# Altium PCB PCB.PcbDoc
Units mm, origin at the board's own origin, x right, y up, seen from the top; angles counter-clockwise.
Board outline 100 x 100 mm, 2 copper layers (Top Layer, Bottom Layer); 55 components, 45 nets, 174 pads, 27 vias.
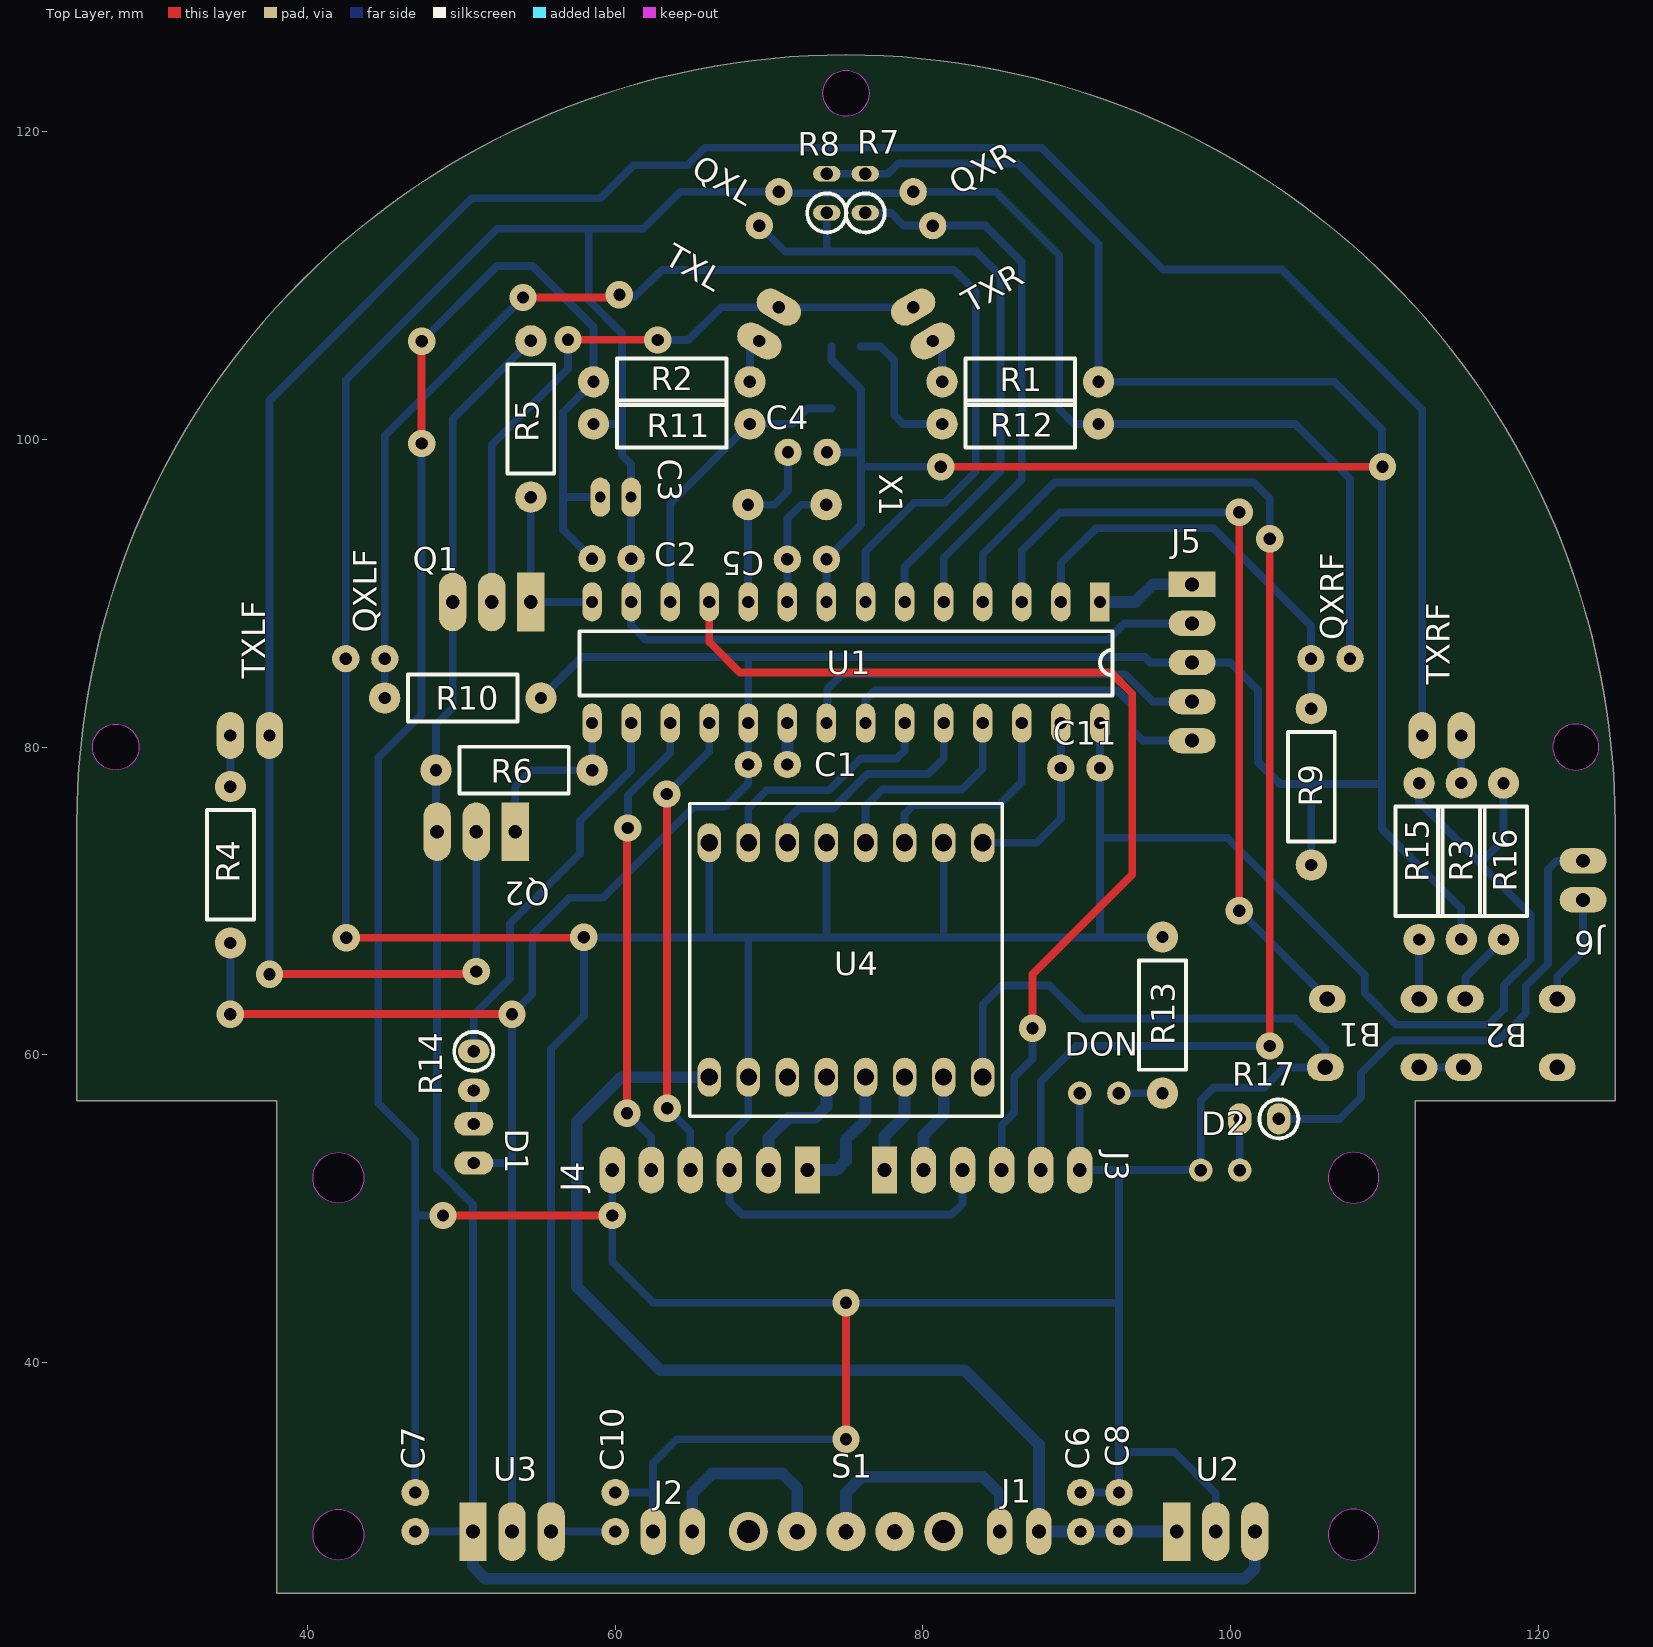
[diagram p0: Top Layer view]
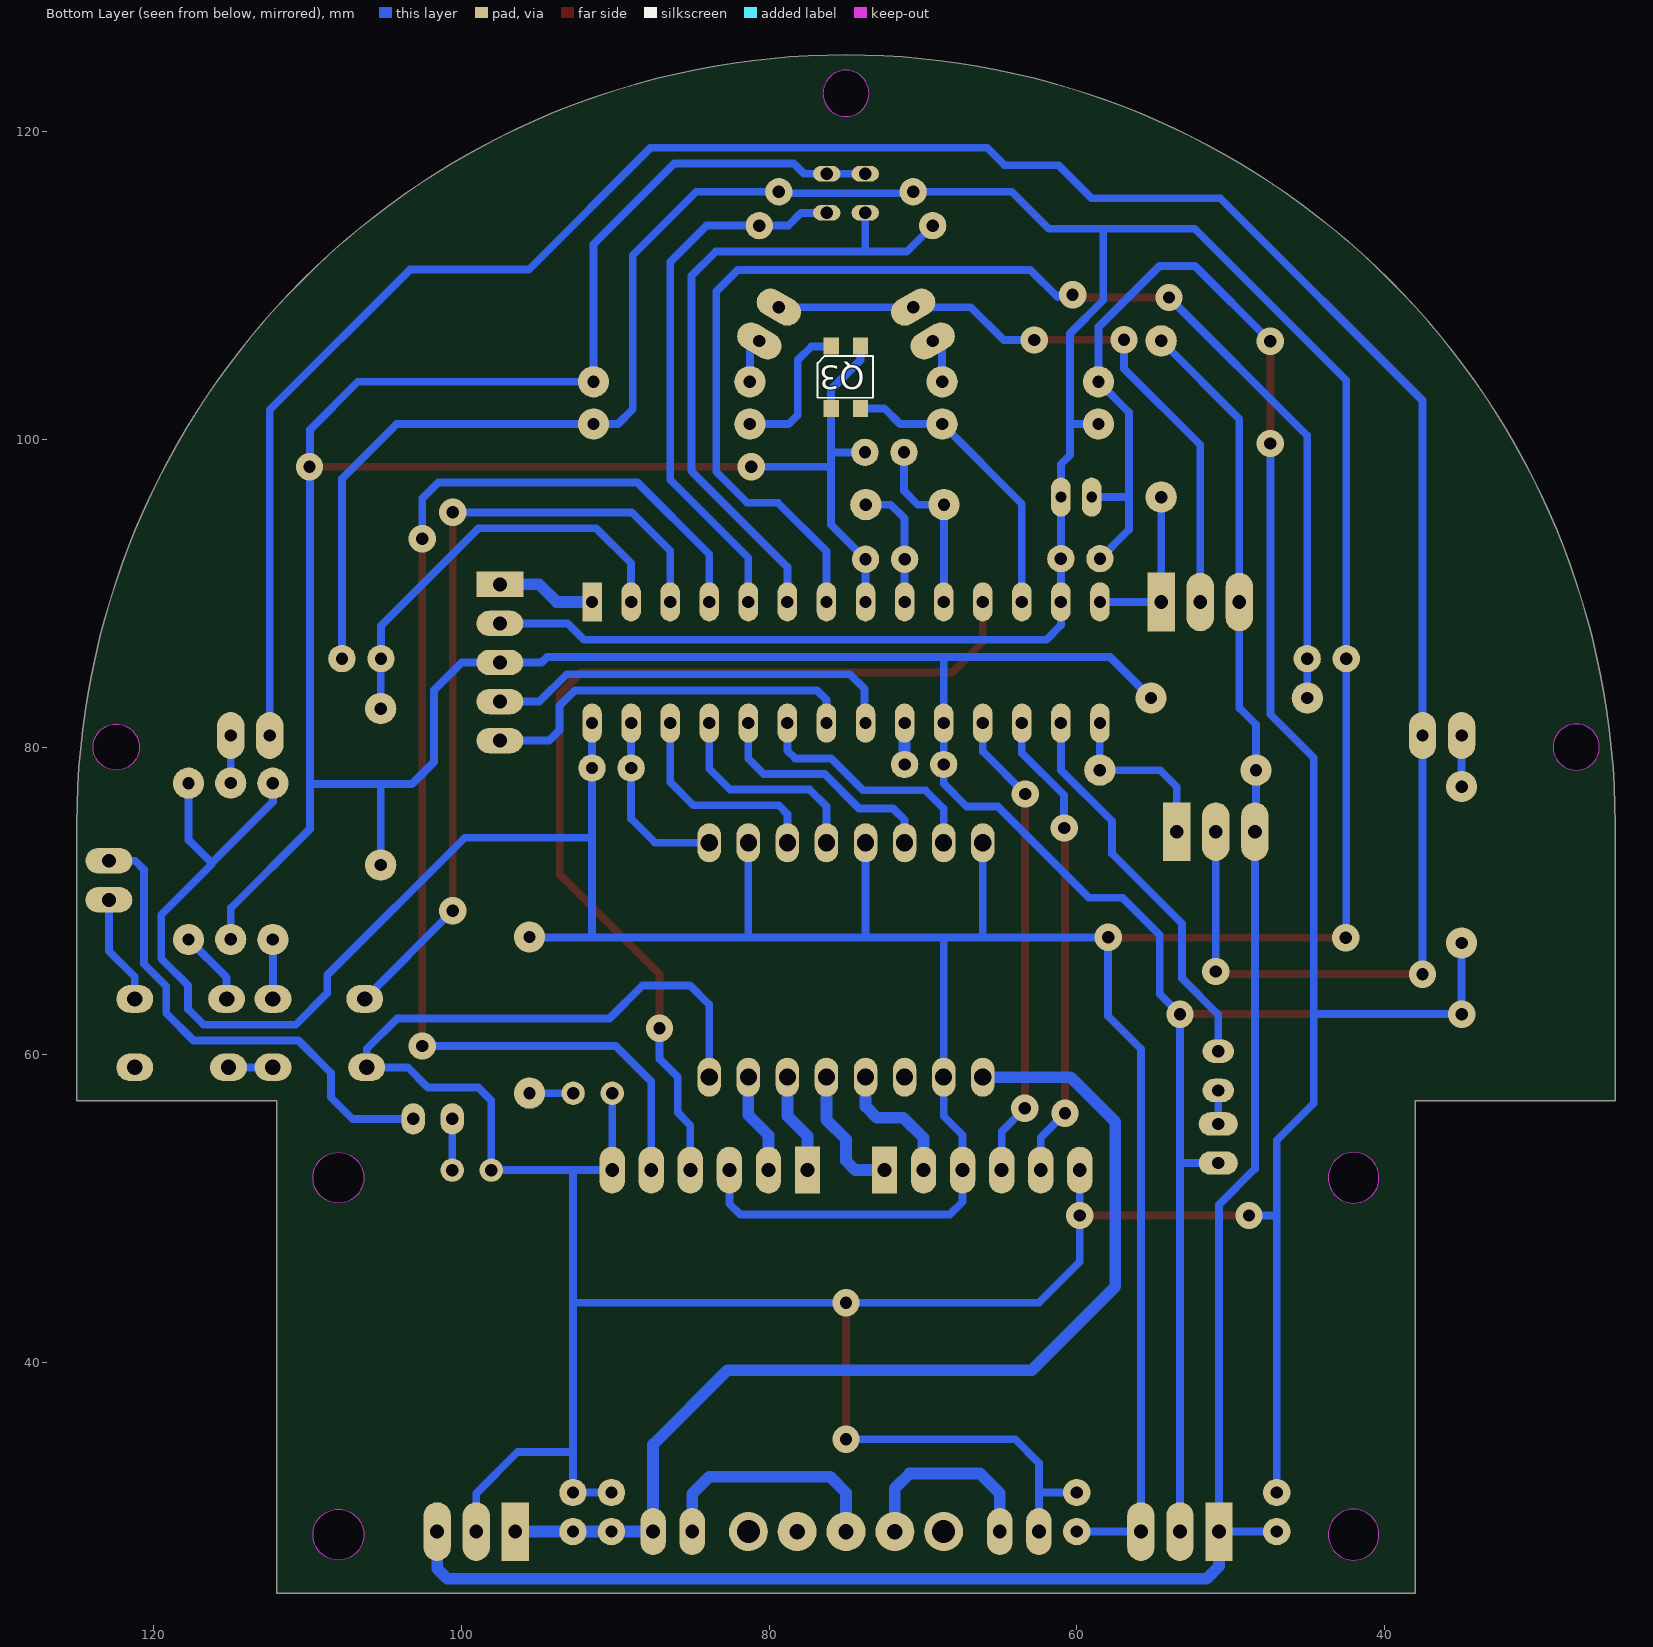
[diagram p1: Bottom Layer view, seen from below]

## Layer stack, top to bottom
Top Solder: solder mask 0.0102, Solder Resist, Dk 3.5
Top Layer: signal copper 0.0356
Dielectric 1: dielectric 0.32, FR-4, Dk 4.8
Bottom Layer: signal copper 0.0356
Bottom Solder: solder mask 0.0102, Solder Resist, Dk 3.5

## Board outline
25,57 38,57 38,25 112,25 112,57 125,57 125,75 ccw(c75,75) 25,75
cut-out: 75,121 cw(c75,122.5) 73.5,122.5 cw(c75,122.5) 75,124 cw(c75,122.5) 76.5,122.5 cw(c75,122.5)
cut-out: 120.945,80 ccw(c122.445,80) 122.445,78.5 ccw(c122.445,80) 123.945,80 ccw(c122.445,80) 122.445,81.5 ccw(c122.445,80)
cut-out: 27.524,78.5 cw(c27.524,80) 26.024,80 cw(c27.524,80) 27.524,81.5 cw(c27.524,80) 29.024,80 cw(c27.524,80)
cut-out: 42,50.35 cw(c42,52) 40.35,52 cw(c42,52) 42,53.65 cw(c42,52) 43.65,52 cw(c42,52)
cut-out: 40.35,28.8 cw(c42,28.8) 42,30.45 cw(c42,28.8) 43.65,28.8 cw(c42,28.8) 42,27.15 cw(c42,28.8)
cut-out: 106.35,52 ccw(c108,52) 108,50.35 ccw(c108,52) 109.65,52 ccw(c108,52) 108,53.65 ccw(c108,52)
cut-out: 106.35,28.8 ccw(c108,28.8) 108,27.15 ccw(c108,28.8) 109.65,28.8 ccw(c108,28.8) 108,30.45 ccw(c108,28.8)

## Design rules (kind name [scope] priority, off if disabled: settings)
Clearance [All] p1: gap=0.508
PolygonConnect [All] p1: connectstyle=Relief reliefconductorwidth=0.254 reliefentries=4 polygonreliefangle="90 Angle" airgapwidth=0.254
RoutingVias [All] p1: holewidth=0.8 width=1.778 viastyle="Through Hole" minholewidth=0.8 minwidth=1.778 maxholewidth=0.8 maxwidth=1.778
SolderMaskExpansion [All] p1: expansion=0.102
Width [All] p1: maxlimit=1.27 minlimit=0.508 preferedwidth=0.762
30 further rules are at their usual default settings.

## Components (designator, comment, footprint, x,y, rotation, side; value= is the part's Value field where it differs from the comment)
B1 "BUTTON" TACT_SWITCH-SMALL-4PIN 112.256,63.625 r180 top
B2 "BUTTON" TACT_SWITCH-SMALL-4PIN 121.236,63.625 r180 top
C1 "Tantalio" CAP-CER 70.301,78.87 r0 top
C2 "CAP-CER" CAP-CER 59.379,92.25 r180 top
C3 "CAP-ELEC" CAP-ELEC-5X11X2MM 60.03,96.25 r180 top
C4 "CAP-CER" CAP-CER 72.881,99.16 r0 top
C5 "CAP-CER" CAP-CER 72.841,92.21 r0 top
C6 "CAP-CER" CAP-CER 90.25,29.889 r270 top
C7 "CAP-CER" CAP-CER 47,29.889 r270 top
C8 "CAP-CER" CAP-CER 92.75,29.889 r270 top
C10 "CAP-CER" CAP-CER 60,29.889 r270 top
C11 "For pin" CAP-CER 89.859,78.64 r180 top
D1 "LED" LED-3MM-YELLOW#1 50.8,54.23 r270 top
D2 "LED" LED-3MM-YELLOW#2 99.33,52.5 r180 top
DON "LED" LED-3MM-RED 91.47,57.5 r180 top
J1 "Header 1x2" "HEADER 1X2" 86.27,29 r270 top
J2 "Header 1x2" "HEADER 1X2" 63.73,29 r270 top
J3 "Motor Izquierda" "HEADER 1X6" 72.5,52.5 r270 top
J4 "Motor Derecha" "HEADER 1X6" 77.5,52.5 r90 top
J5 "PICkit" "HEADER 1X5" 97.5,90.58 r0 top
J6 "Expansion de UI. Conectar a PGD/PGC" "HEADER 1x2" 122.92,71.34 r180 top
Q1 "P-MOS" TO-220 54.51,89.43 r270 top
Q2 "P-MOS" TO-220 53.5,74.5 r270 top
Q3 "QRE1113GR" QRE1113GR 75,104.06 r270 bottom
QXL "TEFT4300" PHOTO-NPN-2 70,115 r60 top
QXLF "TEFT4300" PHOTO-NPN 43.75,85.75 r0 top
QXR "TEFT4300" PHOTO-NPN 80,115 r300 top
QXRF "TEFT4300" PHOTO-NPN-2 106.5,85.75 r0 top
R1 "RES" RES-AXIAL-400MIL 91.41,103.75 r180 top
R2 "RES" RES-AXIAL-400MIL 58.59,103.75 r0 top
R3 "RES" RES-AXIAL-400MIL 115,67.5 r90 top
R4 "RES" RES-AXIAL-400MIL 34.98,67.27 r90 top
R5 "RES" RES-AXIAL-400MIL 54.51,96.25 r90 top
R6 "RES" RES-AXIAL-400MIL 58.5,78.5 r180 top
R7 "RES" "RES VERTICAL"#1 76.25,116 r270 top
R8 "RES" "RES VERTICAL"#1 73.75,116 r270 top
R9 "RES" RES-AXIAL-400MIL 105.25,72.34 r90 top
R10 "RES" RES-AXIAL-400MIL 55.17,83.19 r180 top
R11 "RES" RES-AXIAL-400MIL 68.75,101 r180 top
R12 "RES" RES-AXIAL-400MIL 81.25,101 r0 top
R13 "RES" RES-AXIAL-400MIL 95.58,57.5 r90 top
R14 "RES" "RES VERTICAL"#2 50.8,58.95 r90 top
R15 "RES" RES-AXIAL-400MIL 112.26,67.49 r90 top
R16 "RES" RES-Axial-400mil 117.74,67.49 r90 top
R17 "RES" "RES VERTICAL"#2 101.87,55.83 r0 top
S1 "SLIDE-SWITCH" SWITCH 75,29 r0 top
TXL "SFH4545" LED-5MM-RED-90 70,107.5 r240 top
TXLF "SFH4545" LED-5MM-RED-90 36.25,80.75 r180 top
TXR "SFH4545" LED-5MM-RED-90-2 80,107.5 r120 top
TXRF "SFH4545" LED-5MM-RED-90-2 113.73,80.75 r180 top
U1 "DSPIC33FJ64MC202-I/SP" DIP28 75,85.5 r270 top
U2 "LM78T05" TO-220 96.5,29 r90 top
U3 "LM1086" TO-220 50.75,29 r90 top
U4 "ROB-14450" ROB-14450 75,66.16 r0 top
X1 "XTAL" HC-49/S 71.17,95.76 r180 top

## Footprints (in the part's own frame and the unit in brackets; to place one, negate y for a bottom-side part, rotate by r counter-clockwise, add the part's x,y. Pads: shape width x height; smd on the part's side, far side on the other; paste and mask are expansions set on the pad)
CAP-CER [mil]
  round 70 hole 31.5: 1(-65,0) 2(35,0)
  body extent -107,-44 87,34, height 207
CAP-ELEC-5X11X2MM [mm]
  oval 1.27x2.54 hole 0.7: 1(-1,0) 2(1,0)
  body extent -2.53,-2.53 2.52,2.53, height 11.53
DIP28 [mm]
  rect 2.54x1.27 hole 0.8: 1(-3.937,16.51)
  oval 2.54x1.27 hole 0.8: 2(-3.937,13.97) 3(-3.937,11.43) 4(-3.937,8.89) 5(-3.937,6.35) 6(-3.937,3.81) 7(-3.937,1.27) 8(-3.937,-1.27) 9(-3.937,-3.81) 10(-3.937,-6.35) 11(-3.937,-8.89) 12(-3.937,-11.43) 13(-3.937,-13.97) 14(-3.937,-16.51) 15(3.937,-16.51) 16(3.937,-13.97) 17(3.937,-11.43) 18(3.937,-8.89) 19(3.937,-6.35) 20(3.937,-3.81) 21(3.937,-1.27) 22(3.937,1.27) 23(3.937,3.81) 24(3.937,6.35) 25(3.937,8.89) 26(3.937,11.43) 27(3.937,13.97) 28(3.937,16.51)
  silkscreen extent -2.03,-17.34 2.16,17.34, body extent -3.95,-17.32 3.95,17.33, height 5.09
HC-49/S [mil]
  round 80 hole 31.5: 1(-100,0) 2(100,0)
  body extent -223,-90 223,93, height 138
"HEADER 1X2" [mil]
  oval 120x65 hole 35.43: 1(0,50) 2(0,-50)
  body extent -49,-100 49,100, height 336
"HEADER 1x2" [mil]
  oval 120x65 hole 35.43: 1(0,50) 2(0,-50)
  body extent -49,-100 49,100, height 336
"HEADER 1X5" [mil]
  rect 120x65 hole 35.43: 1(0,0)
  oval 120x65 hole 35.43: 2(0,-100) 3(0,-200) 4(0,-300) 5(0,-400)
  body extent -49,-450 49,50, height 336
"HEADER 1X6" [mil]
  rect 120x65 hole 35.43: 1(0,0)
  oval 120x65 hole 35.43: 2(0,-100) 3(0,-200) 4(0,-300) 5(0,-400) 6(0,-500)
  body extent -49,-550 49,50, height 336
LED-3MM-RED [mil]
  round 60 hole 31.5: A(-50,0) K(50,0)
  body extent -66,-65 64,65, height 217
LED-3MM-YELLOW#1 [mm]
  oval 1.524x2.54 hole 0.8: A(-1.27,0) K(1.27,0)
  body extent -1.66,-1.65 1.64,1.65, height 5.51
LED-3MM-YELLOW#2 [mm]
  round 1.524 hole 0.8: A(-1.27,0) K(1.27,0)
  body extent -1.66,-1.65 1.64,1.65, height 5.51
LED-5MM-RED-90 [mil]
  oval 70x120 hole 31.5: A(-50,0) K(50,0)
  body extent -116,-421 96,10, height 234
LED-5MM-RED-90-2 [mil]
  oval 70x120 hole 31.5: A(50,0) K(-50,0)
  body extent -96,-421 116,10, height 234
PHOTO-NPN [mil]
  round 70 hole 31.5: C(-50,0) E(50,0)
  body extent -76,-10 65,287, height 155
PHOTO-NPN-2 [mil]
  round 70 hole 31.5: C(50,0) E(-50,0)
  body extent -65,-9 76,289, height 155
QRE1113GR [mm]
  rect 1.1x1 smd: A(-2.01,-0.97) C(2.04,0.94) E(-2.01,0.94) K(2.04,-0.97)
  silkscreen extent -1.35,-1.85 1.35,1.75, body extent -2.4,-1.8 2.4,1.8, height 1.83
"RES VERTICAL"#1 [mil]
  oval 40x70 hole 31.5: 1(-50,0) 2(50,0)
  silkscreen extent 0,-50 100,50, body extent -60,-36 86,36, height 267
"RES VERTICAL"#2 [mil]
  oval 60x80 hole 31.5: 1(-50,0) 2(50,0)
  silkscreen extent 0,-50 100,50, body extent -60,-36 86,36, height 267
RES-AXIAL-400MIL [mil]
  round 80 hole 31.5: 1(0,0) 2(400,0)
  silkscreen extent 60,-60 340,60, body extent -12,-44 410,44, height 94
RES-Axial-400mil [mil]
  round 80 hole 31.5: 1(0,0) 2(400,0)
  silkscreen extent 60,-60 340,60, body extent -12,-44 410,44, height 94
ROB-14450 [mm]
  oval 1.524x2.54 hole 1.11: 1(-8.89,-7.62) 2(-6.35,-7.62) 3(-3.81,-7.62) 4(-1.27,-7.62) 5(1.27,-7.62) 6(3.81,-7.62) 7(6.35,-7.62) 8(8.89,-7.62) 9(-8.89,7.62) 10(-6.35,7.62) 11(-3.81,7.62) 12(-1.27,7.62) 13(1.27,7.62) 14(3.81,7.62) 15(6.35,7.62) 16(8.89,7.62)
  silkscreen extent -10.16,-10.16 10.16,10.16, body extent -10.54,-10.48 10.44,10.43, height 6.08
SWITCH [mm]
  round 2.54 hole 1: 1(-3.175,0) 2(0,0) 3(3.175,0)
  round 2.54 hole 1.5: 4(-6.35,0) 4(6.35,0)
  body extent -7,-3.1 7,3.1, height 9.65
TACT_SWITCH-SMALL-4PIN [mm]
  oval 2.4x1.8 hole 1: 1(0,4.445) 1(6.096,4.445) 2(0,0) 2(5.969,0)
  body extent -0.94,-0.79 7.04,5.21, height 5.15
TO-220 [mm]
  rect 3.81x1.778 hole 0.9: 1(0,0)
  oval 3.81x1.778 hole 0.9: 2(0,-2.54) 3(0,-5.08)
  body extent -1.61,-7.75 2.88,2.55, height 16.8

## Part data
C1 C11: library part CAP-CER
J3 J4: library part "Header 1x6"
J6: library part "Header 1x2"
Q1 Q2: library part P-MOSFET
QXL QXLF QXR QXRF: library part "PHOTO NPN"
TXL TXLF TXR TXRF: library part LED
U1: "High-Performance 16-bit Digital Signal Controller, 64 KB Flash, 8 KB RAM, 28-Pin SPDIP, Industrial Temperature"
U2 U3: library part LM78XX
U4: "Power Management IC Development Tools SparkFun MotorDriver Dual TB6612FNG Head."

## Via types
v1: diameter 1.778, hole 0.8, Top Layer to Bottom Layer, 27 vias

## Nets (pads, with @x,y where several pads share a name; then routed paths per layer and width w, separated by ;. In a path a pad name is that pad's centre, name@x,y a point inside that pad or via, vN(x,y) a via of type N, cw(c..) or ccw(c..) an arc to the next point about the centre after c; other vN are vias at no path point)
5V: C7.2 Q1.3 Q2.3 R5.2 R6.2 U2.3 U3.1 | length 140.8
  Bottom Layer w0.508: C7.2 U3.1 50.75,50.25 48.42,52.58 Q2.3 48.34,74.58 R6.2 48.34,81.46 49.43,82.55 Q1.3 49.43,101.33 R5.2
  Bottom Layer w0.762: U3.1 50.75,26.74 51.56,25.93 100.92,25.93 101.58,26.59 U2.3
BTN1: B1.2 R15.1 U1.3 | length 56.4
  Top Layer w0.508: v1(100.56,69.352) v1(100.56,95.26)
  Bottom Layer w0.508: U1.3 86.43,92.76 88.93,95.26 v1(100.56,95.26) ; v1(100.56,69.352) B1.2@106.287,63.625 ; B1.2@112.256,63.625 112.256,67.486 R15.1
BTN2: B2.2 J6.1 R16.1 | length 12
  Bottom Layer w0.508: B2.2@115.267,63.625 115.267,65.017 R16.1 ; B2.2@121.236,63.625 121.236,65.059 122.92,66.743 J6.1
CNY: Q3.C R11.1 U1.12 | length 19.4
  Bottom Layer w0.508: U1.12 63.57,95.82 R11.1 71.49,101 72.51,102.02 Q3.C
DIR_D: U1.26 U4.14 | length 14.2
  Bottom Layer w0.508: U4.14 78.81,75.65 79.38,76.22 84.92,76.22 86.43,77.73 U1.26
DIR_I: U1.24 U4.11 | length 15.6
  Bottom Layer w0.508: U4.11 71.19,75.26 71.94,76.01 74.15,76.01 76.392,78.252 80.342,78.252 81.35,79.26 U1.24
ENCDA: J4.4 U1.11 | length 66
  Top Layer w0.508: U1.11 66.11,86.84 68.1,84.85 92.23,84.85 93.61,83.47 93.61,71.72 87.12,65.23 v1(87.12,61.73)
  Bottom Layer w0.508: J4.4 85.12,55.42 85.94,56.24 85.94,58.55 87.12,59.73 v1(87.12,61.73)
ENCDB: J4.5 U1.4 | length 81.3
  Top Layer w0.508: v1(102.55,60.57) v1(102.55,93.55)
  Bottom Layer w0.508: U1.4 83.89,92.54 88.55,97.2 101.51,97.2 102.55,96.16 v1(102.55,93.55) ; J4.5 87.66,58.26 89.97,60.57 v1(102.55,60.57)
ENCIA: J3.4 U1.18 | length 30.8
  Top Layer w0.508: v1(63.34,76.95) 63.37,76.92 v1(63.37,56.52)
  Bottom Layer w0.508: v1(63.34,76.95) 66.11,79.72 U1.18 ; v1(63.37,56.52) 64.88,55.01 J3.4
ENCIB: J3.5 U1.17 | length 31.1
  Top Layer w0.508: v1(60.76,56.2) 61.05,56.49 60.76,56.78 60.76,74.68 v1(60.82,74.74)
  Bottom Layer w0.508: v1(60.76,56.2) 62.34,54.62 J3.5 ; v1(60.82,74.74) 60.82,76.869 63.57,79.619 U1.17
GND: B1.1 B2.1 C1.1 C2.2 C3.2 C4.2 C5.2 C6.1 C7.1 C8.1 C10.1 C11.2 D1.K D2.K DON.K J2.2 J3.6 J4.6 J5.3 Q3.E Q3.K R1.1 R2.1 R3.1 R4.1 R7.1 R8.1 R9.1 R10.1 U1.8 U1.19 U1.27 U2.2 U3.2 U4.3 U4.8 U4.16 | length 604.2
  Top Layer w0.508: v1(34.98,62.64) v1(53.29,62.64) ; v1(47.41,99.74) v1(47.41,106.38) ; v1(48.8,49.55) v1(59.8,49.55) ; v1(75,35) v1(75,43.88) ; v1(81.16,98.22) v1(109.88,98.22)
  Bottom Layer w0.508: R4.1 v1(34.98,62.64) 44.59,62.64 ; C7.1 47,49.55 ; v1(47.41,99.74) 47.41,82.13 44.59,79.31 44.59,62.64 ; v1(47.41,106.38) 52.31,111.28 54.615,111.28 58.59,107.305 R2.1 56.61,101.77 56.61,96.25 ; v1(48.8,49.55) 47,49.55 ; D1.K 53.29,52.96 ; U3.2 53.29,52.96 ; R10.1 57.84,85.86 68.65,85.86 ; C2.2 56.61,94.13 56.61,96.25 ; C3.2 56.61,96.25 ; J3.6 v1(59.8,49.55) 59.8,46.54 62.46,43.88 v1(75,43.88) 92.75,43.88 ; C10.1 62.46,31.54 ; J2.2 62.46,31.54 ; U1.8 C5.2 75.97,94.45 75.97,98.22 ; R8.1 R7.1 77.73,117.27 78.404,117.944 86.166,117.944 91.41,112.7 R1.1 106.74,103.75 109.85,100.64 v1@109.85,98.22 ; C4.2 75.95,99.16 75.97,99.18 ; Q3.E 74.06,105.16 75.97,103.25 Q3.K 75.97,99.18 ; v1(75,35) 64,35 62.46,33.46 62.46,31.54 ; v1(81.16,98.22) 75.97,98.22 ; U4.8 83.89,63.26 85.14,64.51 88.22,64.51 90.37,62.36 104.18,62.36 106.16,60.38 106.16,59.18 103.495,59.18 102.175,57.86 98.89,57.86 98.06,57.03 D2.K 94.34,52.5 ; U4.16 87.41,73.78 88.97,75.34 C11.2 U1.27 ; DON.K J4.6 92.75,52.5 ; C6.1 C8.1 92.75,34.18 ; 94.34,52.5 92.75,52.5 ; U2.2 99.04,31.48 96.34,34.18 92.75,34.18 ; R9.1 105.25,77.6 ; v1@109.83,98.17 v1(109.88,98.22) ; v1@109.85,98.17 109.85,77.6 ; B1.1@112.256,59.18 B2.1@115.14,59.18 ; R3.1 115,69.53 109.85,74.68 109.85,77.6 ; 44.59,62.64 44.59,56.84 47,54.43 47,49.55 ; 53.29,52.96 v1(53.29,62.64) 54.6,63.95 54.6,67.78 57.03,70.21 59.2,70.21 65.119,76.129 67.149,76.129 68.65,77.63 C1.1 U1.19 68.65,85.86 ; 68.65,85.86 94.43,85.86 94.79,85.5 J5.3 99.98,85.5 101.78,83.7 101.78,79.03 103.21,77.6 105.25,77.6 ; 75.97,98.22 75.97,99.18 ; 92.75,34.18 92.75,43.88 ; 92.75,43.88 92.75,52.5 ; 105.25,77.6 109.85,77.6
LED1: R14.2 U1.16 | length 25.6
  Bottom Layer w0.508: R14.2 50.8,62.61 53.15,64.96 53.15,68.51 57.7,73.06 57.7,75.186 61.03,78.516 U1.16
LED2: J6.2 R17.2 | length 32.3
  Bottom Layer w0.508: R17.2 107.09,55.83 108.49,57.23 108.49,58.83 110.59,60.93 117.42,60.93 119.19,62.7 119.19,64.45 120.646,65.906 120.646,69.4 120.634,69.412 120.634,70.728 120.646,70.74 120.646,72.046 121.21,72.61 J6.2
MOTD1: J4.2 U4.7 | length 6.6
  Bottom Layer w0.762: J4.2 80.04,54.77 81.35,56.08 U4.7
MOTD2: J4.1 U4.6 | length 6.6
  Bottom Layer w0.762: J4.1 77.5,54.71 78.81,56.02 U4.6
MOTI1: J3.2 U4.4 | length 8.6
  Bottom Layer w0.762: J3.2 69.96,54.59 71.27,55.9 72.99,55.9 73.73,56.64 U4.4
MOTI2: J3.1 U4.5 | length 8.7
  Bottom Layer w0.762: J3.1 74.39,52.5 75,53.11 75,54.51 76.27,55.78 U4.5
NetC1_2: C1.2 U1.20 | length 2.7
  Bottom Layer w0.762: C1.2 U1.20
NetD1_A: D1.A R14.1 | length 2.2
  Bottom Layer w0.508: D1.A R14.1
NetD2_A: D2.A R17.1 | length 3.3
  Bottom Layer w0.508: D2.A R17.1
NetDON_A: DON.A R13.1 | length 3.5
  Bottom Layer w0.508: DON.A R13.1 R13.1@96.25,57.5
NetJ1_2: J1.2 S1.2 | length 15.9
  Bottom Layer w0.762: S1.2 75,31.53 76.03,32.56 83.89,32.56 85,31.45 J1.2
NetJ2_1: J2.1 S1.1 | length 13.1
  Bottom Layer w0.762: J2.1 65,31.5 66.27,32.77 70.87,32.77 71.825,31.815 S1.1
NetQ1_D: Q1.2 TXL.A TXR.A | length 42.4
  Top Layer w0.508: v1(56.93,106.48) v1@62.74,106.48 ; v1@62.74,106.48 v1(62.76,106.46)
  Bottom Layer w0.508: Q1.2 51.97,99.644 56.93,104.604 v1(56.93,106.48) ; v1(62.76,106.46) 64.75,106.46 66.89,108.6 TXL.A TXR.A
NetQ2_D: Q2.2 TXLF.A TXRF.A | length 169.9
  Top Layer w0.508: v1(37.52,65.24) 50.79,65.24 v1(50.96,65.41)
  Bottom Layer w0.508: v1(37.52,65.24) TXLF.A 37.52,102.53 50.67,115.68 59.04,115.68 61.19,117.83 64.69,117.83 65.82,118.96 87.71,118.96 95.63,111.04 103.34,111.04 112.46,101.92 TXRF.A ; v1(50.96,65.41) Q2.2
NetQ3_A: Q3.A R12.1 | length 9.5
  Bottom Layer w0.508: Q3.A@75.935,106.035 77.265,106.035 78.14,105.16 78.14,101.59 78.73,101 R12.1
NetR1_2: R1.2 TXR.K | length 2.9
  Bottom Layer w0.508: TXR.K 81.25,105.785 R1.2
NetR2_2: R2.2 TXL.K | length 2.9
  Bottom Layer w0.508: R2.2 68.75,105.785 TXL.K
NetR3_2: R3.2 TXRF.K | length 3.1
  Bottom Layer w0.508: R3.2 TXRF.K
NetR4_2: R4.2 TXLF.K | length 3.3
  Bottom Layer w0.508: R4.2 TXLF.K
PGC: J5.5 U1.22 | length 25.3
  Bottom Layer w0.508: U1.22 76.27,83.07 76.88,83.68 92.64,83.68 93.63,82.69 93.63,81.1 94.31,80.42 J5.5
PGD: J5.4 U1.21 | length 27.1
  Bottom Layer w0.508: U1.21 73.79,81.623 73.79,83.78 74.75,84.74 93.16,84.74 94.94,82.96 J5.4
PWM_D: U1.25 U4.13 | length 14
  Bottom Layer w0.508: U4.13 76.27,76.15 77.356,77.236 82.526,77.236 83.89,78.6 U1.25
PWM_I: U1.23 U4.10 | length 15.7
  Bottom Layer w0.508: U4.10 68.65,76 69.84,77.19 73.893,77.19 75.971,79.268 78.308,79.268 78.81,79.77 U1.23
QXL: QXL.E R8.2 U1.6 | length 43.3
  Bottom Layer w0.508: QXL.E 71.055,112.21 73.75,112.21 ; R8.2 73.75,112.21 ; U1.6 78.81,91.71 85.05,97.95 85.05,110.63 83.47,112.21 73.75,112.21
QXLF: QXLF.E R10.2 U1.7 | length 85
  Top Layer w0.508: v1(54,109.23) 60.1,109.23 v1(60.27,109.4)
  Bottom Layer w0.508: R10.2 45.01,85.74 QXLF.E 45.02,100.25 v1(54,109.23) ; v1(60.27,109.4) 61.08,109.4 61.24,109.24 63.02,111.02 82.04,111.02 83.44,109.62 83.44,97.9 81.43,95.89 79.43,95.89 76.27,92.73 U1.7
QXR: QXR.E R7.2 U1.5 | length 35.7
  Bottom Layer w0.508: R7.2 77.93,114.73 78.76,113.9 QXR.E 84.07,113.9 86.43,111.54 86.43,97.39 81.35,92.31 U1.5
QXRF: QXRF.E R9.2 U1.2 | length 27.7
  Bottom Layer w0.508: U1.2 88.97,91.95 91.25,94.23 98.89,94.23 105.23,87.89 QXRF.E 105.25,85.73 R9.2
TX_FRONT: Q2.1 R6.1 U1.15 | length 11.4
  Bottom Layer w0.508: Q2.1 53.5,77.42 54.58,78.5 R6.1 58.5,81.553 U1.15
TX_SIDE: Q1.1 R5.1 U1.14 | length 10.8
  Bottom Layer w0.508: R5.1@54.5,96.25 54.5,89.44 Q1.1 58.483,89.43 U1.14
VBAT: C6.2 C8.2 J1.1 U2.1 U4.1 | length 69.4
  Bottom Layer w0.762: U4.1 60.4,58.54 57.49,55.63 57.49,44.93 62.93,39.49 82.71,39.49 87.54,34.66 J1.1 C6.2 C8.2 U2.1
VCC: C2.1 C3.1 C10.2 C11.1 J3.3 J4.3 J5.2 QXL.C QXLF.C QXR.C QXRF.C R11.2 R12.2 R13.2 R15.2 R16.2 U1.13 U1.28 U3.3 U4.2 U4.9 U4.12 U4.15 | length 420.2
  Top Layer w0.508: v1(42.52,67.61) 57.94,67.61 v1(57.96,67.63)
  Bottom Layer w0.508: v1(42.52,67.61) 42.48,67.65 QXLF.C 42.48,103.85 52.33,113.7 58.28,113.7 ; R11.2 60.44,101 ; C10.2 U3.3 55.83,60.38 57.96,62.51 v1(57.96,67.63) 57.97,67.62 66.11,67.62 ; U4.9 66.11,67.62 ; U4.12 73.73,67.62 ; U4.15 81.35,67.62 ; J4.3 82.58,50.32 81.87,49.61 68.26,49.61 67.42,50.45 J3.3 67.42,54.77 68.65,56 U4.2 68.65,67.62 ; U1.28 C11.1 91.51,74.11 ; R13.2@96.25,67.66 96.21,67.62 91.51,67.62 ; J5.2 93.096,88.04 92.036,86.98 61.97,86.98 61.03,87.92 U1.13 C2.1 C3.1 61.03,98.39 60.44,98.98 60.44,101 ; QXRF.C 107.77,97.44 104.21,101 R12.2 89.82,101 88.86,101.96 88.86,111.98 84.74,116.1 QXR.C 79.265,116 70.735,116 QXL.C 64.22,116.1 61.82,113.7 58.28,113.7 ; R15.2 112.26,76.43 116.23,72.46 ; R16.2 117.74,73.97 116.23,72.46 ; 58.28,113.7 58.28,109.052 60.44,106.892 60.44,101 ; 66.11,67.62 68.65,67.62 ; 68.65,67.62 73.73,67.62 ; 73.73,67.62 81.35,67.62 ; 81.35,67.62 91.51,67.62 ; 91.51,67.62 91.51,74.11 ; 91.51,74.11 99.79,74.11 108.72,65.18 108.72,64.01 110.78,61.95 116.76,61.95 117.77,62.96 117.77,64.5 119.518,66.248 119.518,69.092 116.23,72.38 116.23,72.46
VPP: J5.1 U1.1 | length 6.5
  Bottom Layer w0.762: U1.1 93.817,89.437 94.96,90.58 J5.1
XTAL1: C5.1 U1.9 X1.1 | length 8.3
  Bottom Layer w0.508: U1.9 C5.1 71.19,94.86 72.09,95.76 X1.1
XTAL2: C4.1 U1.10 X1.2 | length 11.8
  Bottom Layer w0.508: U1.10 68.63,89.457 X1.2 70.33,95.76 71.23,96.66 C4.1
pads on no net: S1.3 S1.4

## Silkscreen, mask and mechanical layers (free items; w line width, h text height)
Mechanical 1:
  circle w0.254: c75,122.5 r1.5
  circle w0.254: c122.445,80 r1.5
  circle w0.254: c27.524,80 r1.5
  circle w0.254: c42,28.8 r1.65
  circle w0.254: c42,52 r1.65
  circle w0.254: c108,52 r1.65
  circle w0.254: c108,28.8 r1.65
  lines w0.254: 25,57 25,75 cw(c75,75) 125,75 125,57 112,57 112,25 38,25 38,57 25,57
Mechanical 2:
  lines w0.254: 38,55.8 46,55.8 46,48 60.86,48 60.86,44 60.86,36.8 60.86,32.8 45.5,32.8 45.5,25 ; 104.5,25 104.5,32.8 89.14,32.8 89.14,36.8 89.14,44 89.14,48 104.5,48 104.5,55.8 112,55.8
Mechanical 4:
  circle w0.127: c75,122.5 r0.064
  circle w0.127: c75,121 r0.064
  circle w0.127: c27.524,80 r0.064
  circle w0.127: c27.682,81.492 r0.064
  circle w0.127: c122.445,80 r0.064
  circle w0.127: c122.109,81.462 r0.064
  circle w0.127: c109.329,57 r0.064
  circle w0.127: c122.445,57 r0.064
  circle w0.127: c122.445,80 r0.064
  circle w0.127: c34.688,57 r0.064
  circle w0.127: c27.524,57 r0.064
  circle w0.127: c27.524,80 r0.064